# Altium PCB GR_Screen.PcbDoc
Units mil, origin at the board's own origin, x right, y up, seen from the top; angles counter-clockwise.
Board outline 708.66 x 1614.17 mil, 2 copper layers (Top Layer, Bottom Layer); 3 components, 16 nets, 40 pads, 1 vias.
Unrouted connection lines stored in the file: 2.
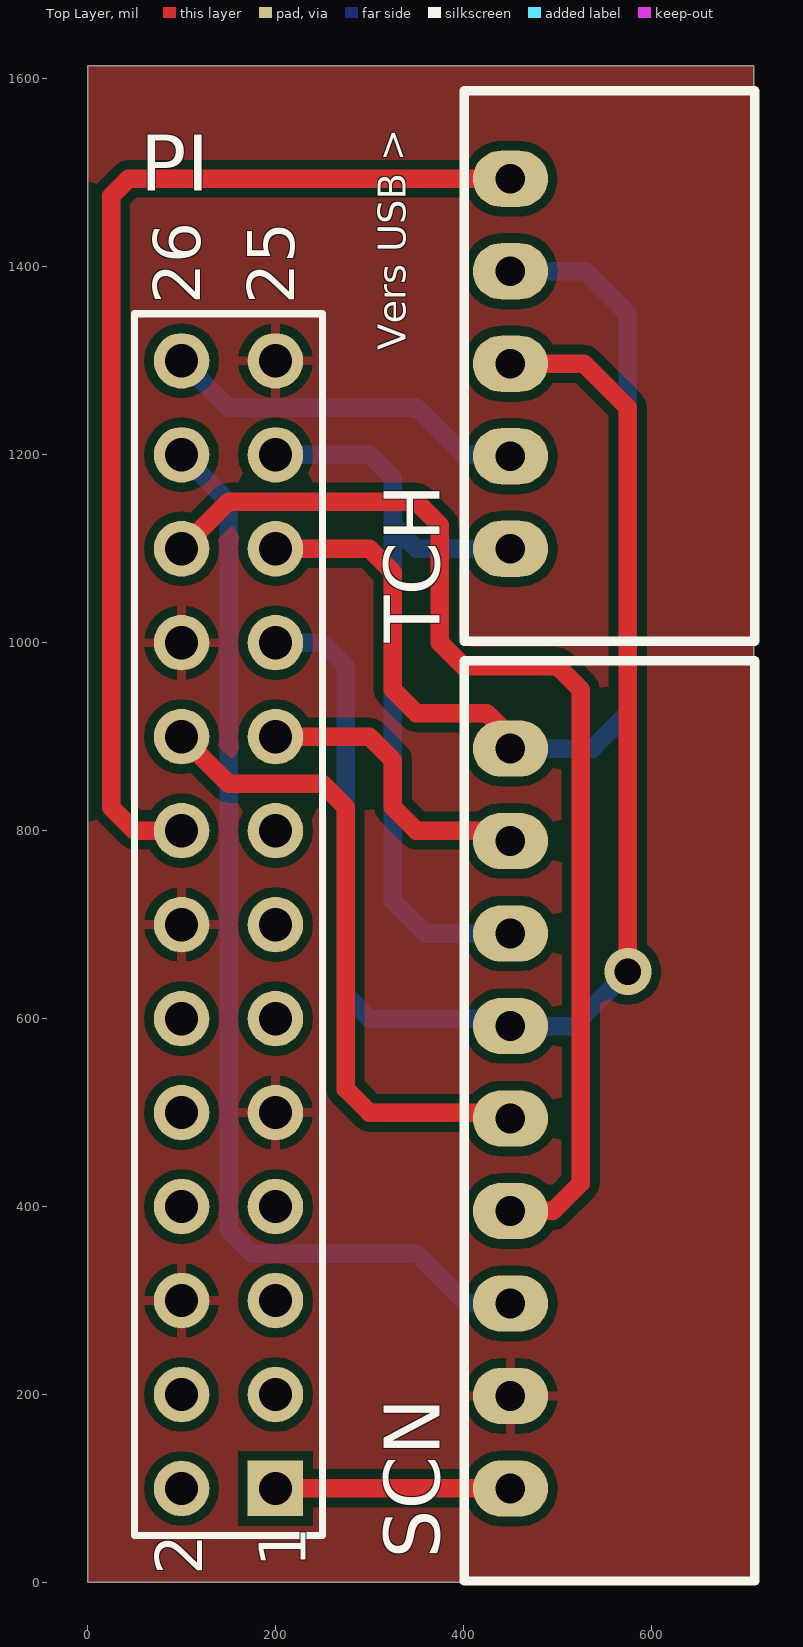
[diagram p0: Top Layer view]
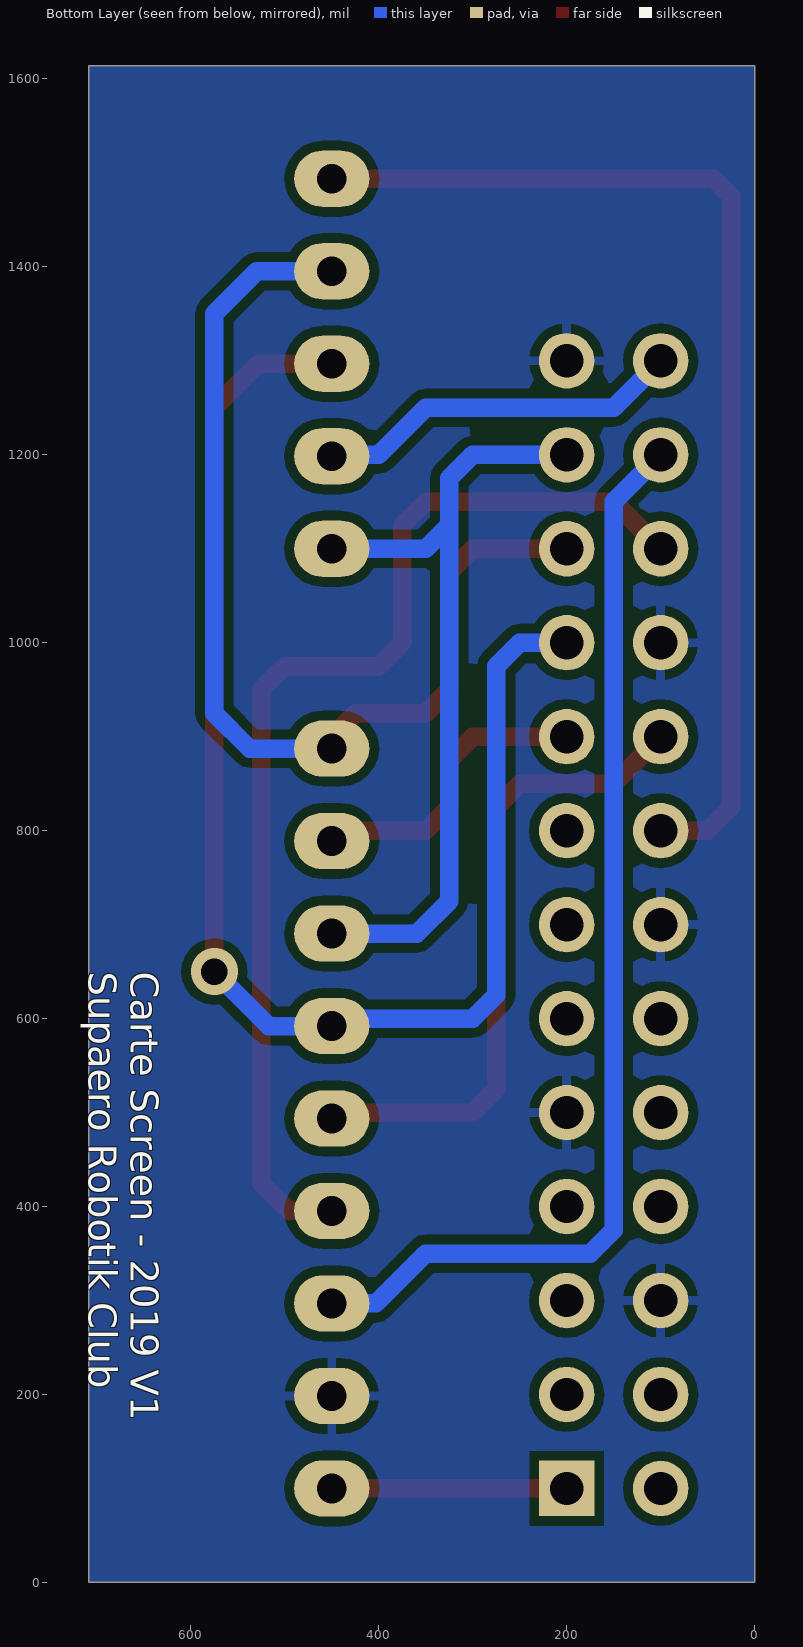
[diagram p1: Bottom Layer view, seen from below]

## Layer stack, top to bottom
Top Solder: solder mask 0.4, Solder Resist, Dk 3.5
Top Layer: signal copper 1.4
Dielectric 1: dielectric 12.6, FR-4, Dk 4.8
Bottom Layer: signal copper 1.4
Bottom Solder: solder mask 0.4, Solder Resist, Dk 3.5

## Board outline
0,0 708.66,0 708.66,1614.17 0,1614.17

## Design rules (kind name [scope] priority, off if disabled: settings)
Clearance [All] p1: gap=10
PolygonConnect [All] p1: connectstyle=Relief reliefconductorwidth=10 reliefentries=4 polygonreliefangle="90 Angle" airgapwidth=10
RoutingVias [All] p1: holewidth=28 width=50 viastyle="Through Hole" minholewidth=28 minwidth=50 maxholewidth=28 maxwidth=50
SolderMaskExpansion [All] p1: expansion=4
Width [All] p1: maxlimit=78.74 minlimit=9.84 preferedwidth=19.68
30 further rules are at their usual default settings.

## Components (designator, comment, footprint, x,y, rotation, side; value= is the part's Value field where it differs from the comment)
PI "Header 13X2" HDR2X13 200,100 r90 top locked
SCN "Header 9H" "MOLEX SPOX 9H" 450,100 r90 top locked
TCH "Header 5H" "MOLEX SPOX 5H" 450,1100 r90 top locked

## Footprints (in the part's own frame and the unit in brackets; to place one, negate y for a bottom-side part, rotate by r counter-clockwise, add the part's x,y. Pads: shape width x height; smd on the part's side, far side on the other; paste and mask are expansions set on the pad)
HDR2X13 [mm] "Connector; Header; 13x2 Position"
  rect 1.5x1.5 hole 0.9: 1(0,0)
  round 1.5 hole 0.9: 2(0,2.54) 3(2.54,0) 4(2.54,2.54) 5(5.08,0) 6(5.08,2.54) 7(7.62,0) 8(7.62,2.54) 9(10.16,0) 10(10.16,2.54) 11(12.7,0) 12(12.7,2.54) 13(15.24,0) 14(15.24,2.54) 15(17.78,0) 16(17.78,2.54) 17(20.32,0) 18(20.32,2.54) 19(22.86,0) 20(22.86,2.54) 21(25.4,0) 22(25.4,2.54) 23(27.94,0) 24(27.94,2.54) 25(30.48,0) 26(30.48,2.54)
  silkscreen extent -1.27,-1.27 31.75,3.81
"MOLEX SPOX 5H" [mil]
  oval 60x80 hole 31.5: 1(0,0) 2(98.43,0) 3(196.85,0) 4(295.28,0) 5(393.7,0)
  silkscreen extent -98,-260 487,49
"MOLEX SPOX 9H" [mil]
  oval 60x80 hole 31.5: 1(0,0) 2(98.43,0) 3(196.85,0) 4(295.28,0) 5(393.7,0) 6(492.13,0) 7(590.55,0) 8(688.98,0) 9(787.4,0)
  silkscreen extent -98,-260 881,49

## Part data
PI: "Header, 13-Pin, Dual row"
SCN: "Header, 9-Pin, Right Angle"
TCH: "Header, 5-Pin, Right Angle"

## Via types
v1: diameter 50, hole 28, Top Layer to Bottom Layer, 1 vias

## Nets (pads, with @x,y where several pads share a name; then routed paths per layer and width w, separated by ;. In a path a pad name is that pad's centre, name@x,y a point inside that pad or via, vN(x,y) a via of type N, cw(c..) or ccw(c..) an arc to the next point about the centre after c; other vN are vias at no path point)
3V3_L: PI.1 PI.17 SCN.1 SCN.8 | length 575.3
  Top Layer w19.68: PI.1 SCN.1 ; PI.17 300,900 325,875 325,825 350,800 438.98,800 SCN.8
5V_L: PI.2 PI.4
DC/RS: PI.18 SCN.5 | length 685.1
  Top Layer w19.68: PI.18 150,850 250,850 275,825 275,525 300,500 SCN.5@443.7,500
GND_L: PI.6 PI.9 PI.14 PI.20 PI.25 SCN.2
I2C1_SCL: PI.5
I2C1_SDA: PI.3
NetD10_2: 
RESET: PI.22 SCN.4 | length 1214.1
  Top Layer w19.68: PI.22 150,1150 350,1150 375,1125 375,1000 400,975 500,975 525,950 525,425 495.28,395.28 SCN.4
RX0: PI.10
SPI0_CS0: PI.24 SCN.3 | length 1178.1
  Bottom Layer w19.68: PI.24 150,1150 150,375 175,350 350,350 403.15,296.85 SCN.3
SPI0_CS1: PI.26 TCH.2 | length 392.1
  Bottom Layer w19.68: PI.26 150,1250 350,1250 400,1200 448.43,1200 TCH.2
SPI0_MISO: PI.21 SCN.9 TCH.4 | length 1128
  Top Layer w19.68: PI.21 300,1100 325,1075 325,950 350,925 425,925 450,900 SCN.9
  Bottom Layer w19.68: SCN.9 537.4,887.4 575,925 575,1350 529.72,1395.28 TCH.4
SPI0_MOSI: PI.19 SCN.6 TCH.3 | length 1521.8
  Top Layer w19.68: TCH.3 528.15,1296.85 575,1250 v1(575,650)
  Bottom Layer w19.68: PI.19 250,1000 275,975 275,625 300,600 442.13,600 SCN.6 517.13,592.13 v1(575,650) ; TCH.3 TCH.3@453.15,1300
SPI0_SCLK: PI.23 SCN.7 TCH.1 | length 860
  Bottom Layer w19.68: PI.23 300,1200 325,1175 325,1125 ; SCN.7 359.45,690.55 325,725 325,1125 ; TCH.1 350,1100 325,1125
T_IRQ: PI.16 TCH.5 | length 1168.1
  Top Layer w19.68: PI.16 50,800 25,825 25,1475 43.7,1493.7 TCH.5
TX0: PI.8
pads on no net: PI.7 PI.11 PI.12 PI.13 PI.15

## Polygon pours and split planes (outlines as drawn)
GND_L on Bottom Layer "Bot GND_L" (solid, remove dead copper, pour order 0): 0,0 708.66,0 708.66,1614.17 0,1614.17
GND_L on Top Layer "Top GND_L" (solid, pour order 2): 0,1614.17 708.66,1614.17 708.66,0 0,0

## Silkscreen, mask and mechanical layers (free items; w line width, h text height)
Top Overlay:
  text "Vers USB >" at 338.58,1311.02 h30 r90
Bottom Overlay:
  text "Carte Screen - 2019 V1 / Supaero Robotik Club" at 708.66,650 h30 r90
Mechanical 2:
  the board outline again, w10

## Text inside footprints (layer, text, board x,y; h text height)
PI: Top Overlay "26" at 120,1360 h50 r90; Top Overlay "25" at 220,1360 h50 r90; Top Overlay "1" at 232.28,15.75 h50 r90; Top Overlay "2" at 122.05,7.87 h50 r90